# Altium PCB PCB_EasyEDA_2024-05-02.pcbdoc
Units mm, origin at the board's own origin, x right, y up, seen from the top; angles counter-clockwise.
Board outline 101.65 x 114.65 mm, 2 copper layers (Top Layer, Bottom Layer); 29 components, 51 nets, 135 pads, 0 vias.
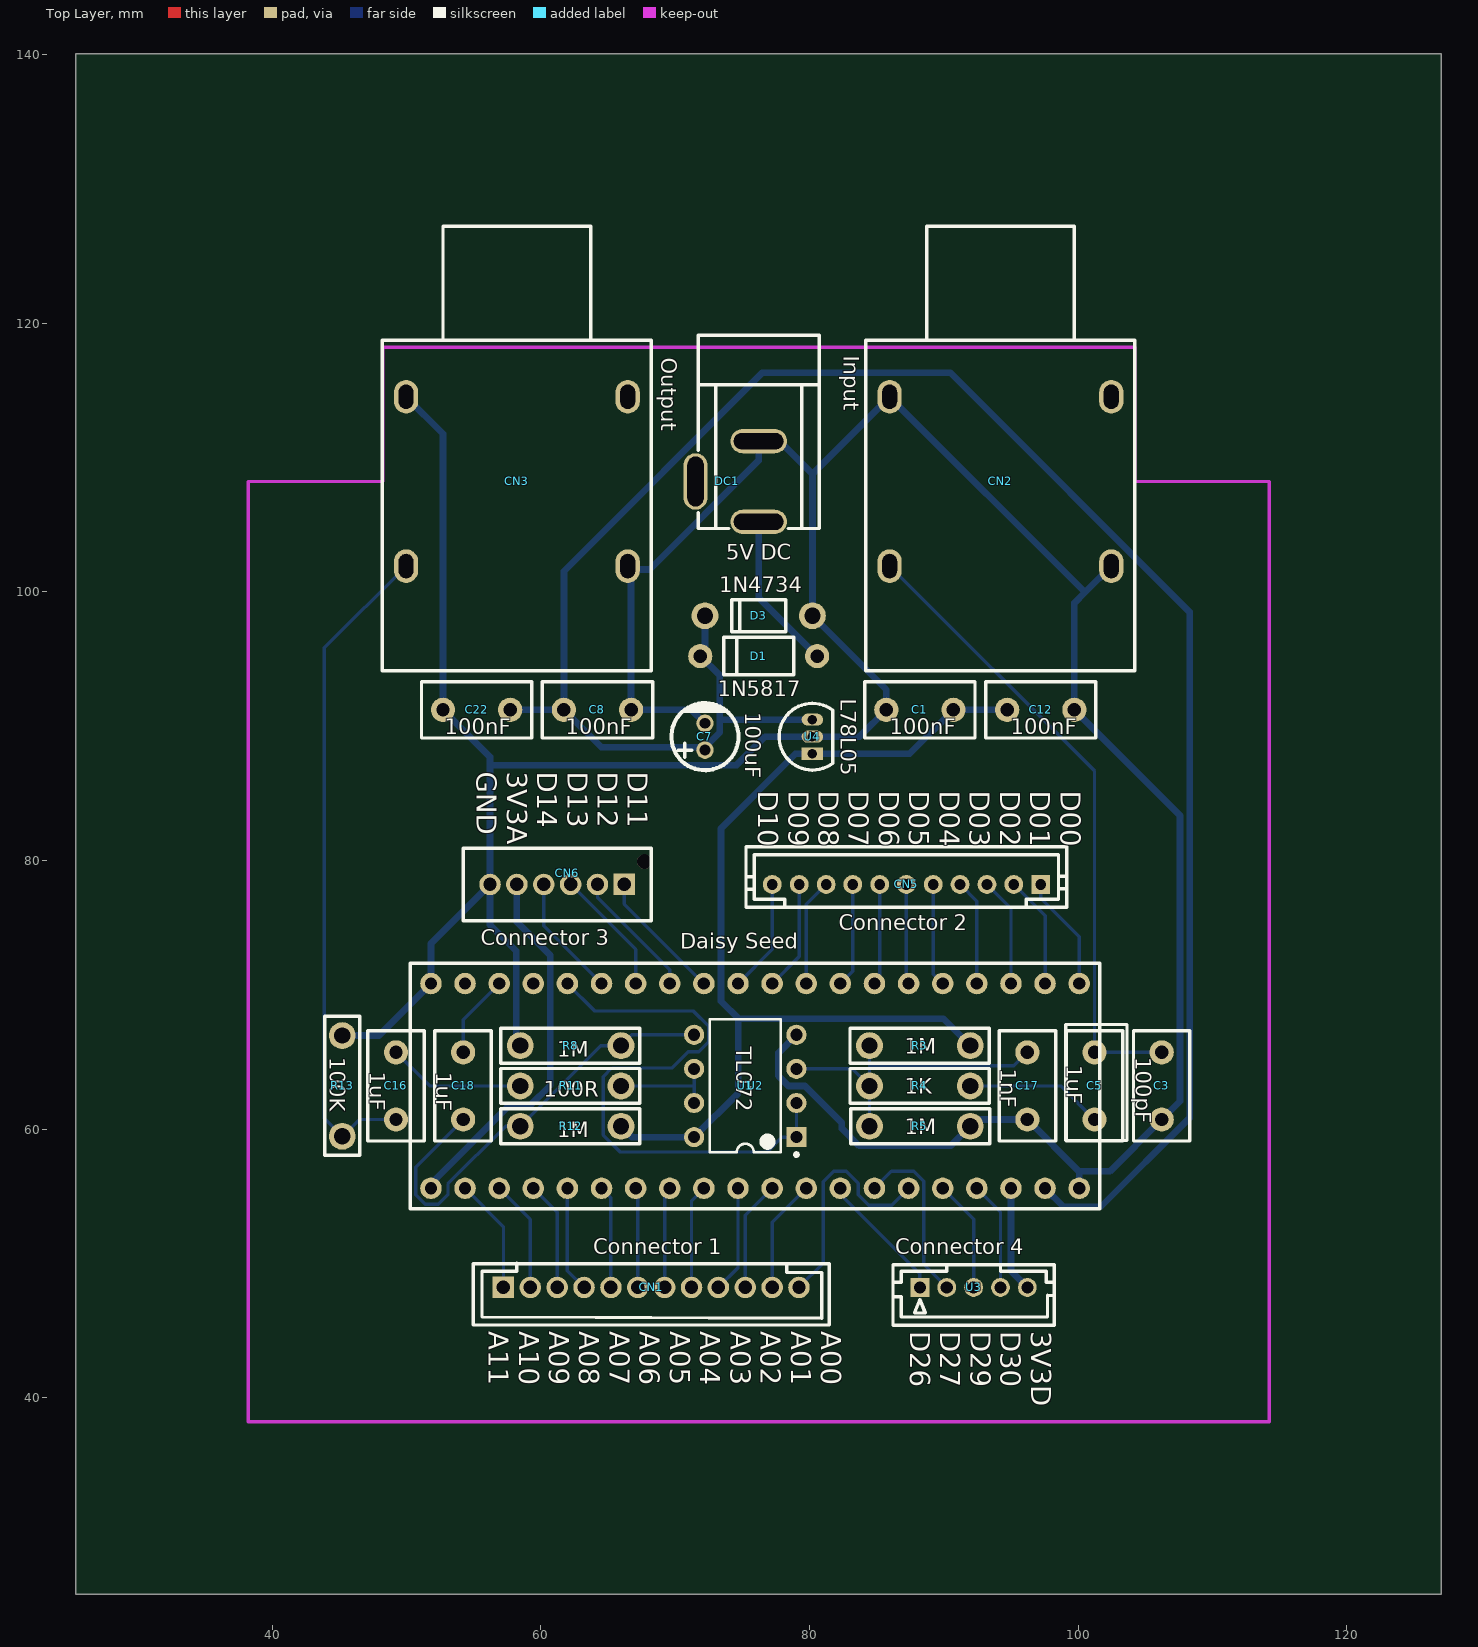
[diagram p0: Top Layer view]
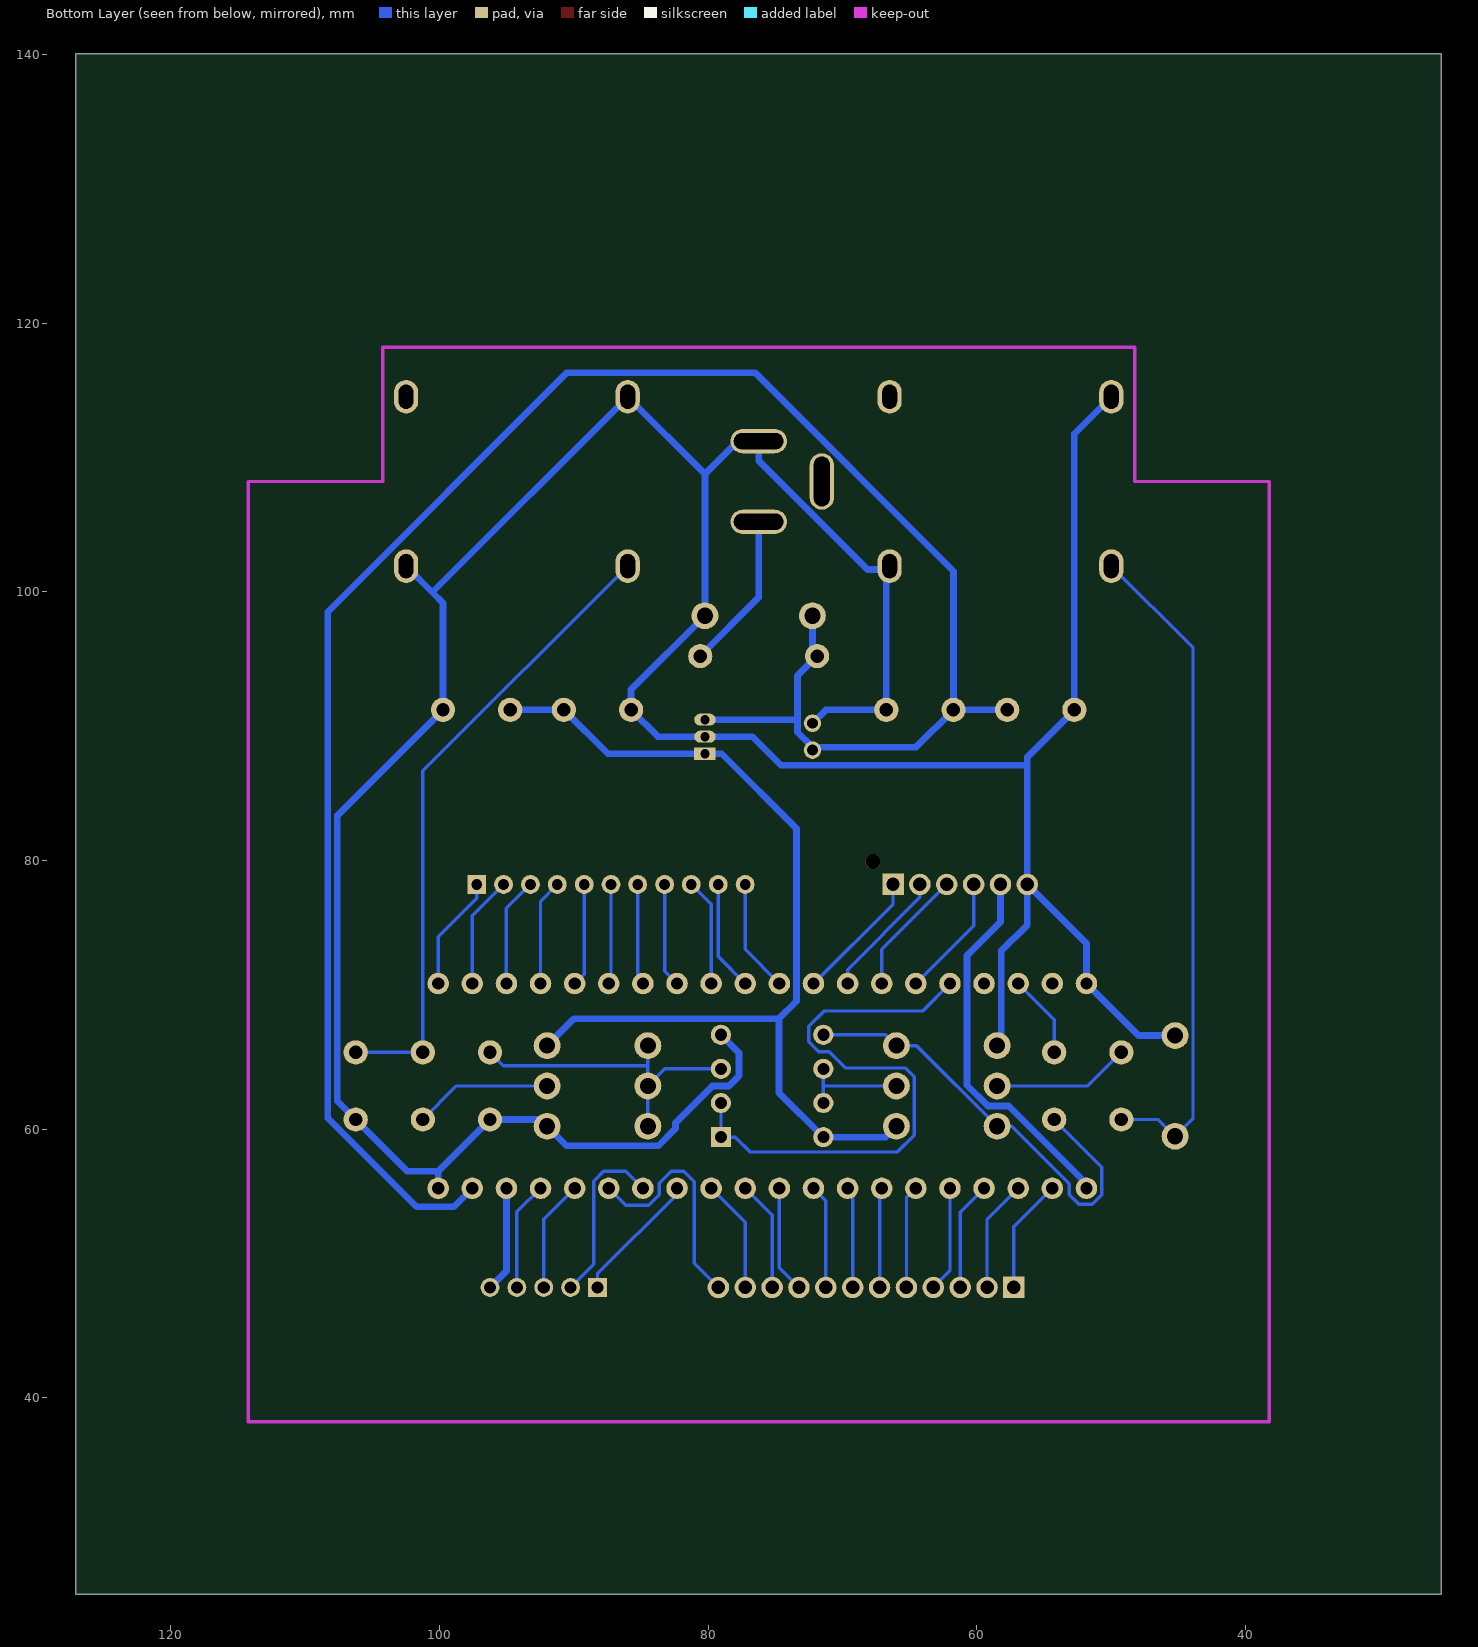
[diagram p1: Bottom Layer view, seen from below]

## Layer stack, top to bottom
Top Solder: solder mask 0.0102, Solder Resist, Dk 3.5
Top Layer: signal copper 0.0356
Dielectric1: dielectric 0.32, FR-4, Dk 4.8
Bottom Layer: signal copper 0.0356
Bottom Solder: solder mask 0.0102, Solder Resist, Dk 3.5

## Board outline
127.054,25.4 25.4,25.4 25.4,140.054 127.054,140.054

## Design rules (kind name [scope] priority, off if disabled: settings)
Clearance [All] p1: gap=0.254 ignorepadtopadclearanceinfootprint=FALSE except(0: Arc-Hole Track-Hole SMDPad-Hole THPad-Hole Via-Hole Fill-Hole Poly-Hole Region-Hole Text-Hole)
PolygonConnect [All] p1: connectstyle=Relief reliefconductorwidth=0.254 reliefentries=4 polygonreliefangle="90 Angle" airgapwidth=0.254
RoutingVias [All] p1: holewidth=0.711 width=1.27 viastyle="Through Hole" minholewidth=0.711 minwidth=1.27 maxholewidth=0.711 maxwidth=1.27
SolderMaskExpansion [All] p1: expansion=0.102 istentingtop=FALSE
Width [All] p1: maxlimit=0.254 minlimit=0.254 preferedwidth=0.254
30 further rules are at their usual default settings.

## Components (designator, comment, footprint, x,y, rotation, side; value= is the part's Value field where it differs from the comment)
C1 "100nF" CAP-TH_L8.0-W4.0-P5.00-D0.7 88.227,91.227 r0 top
C3 "100pF" CAP-TH_L8.0-W4.0-P5.00-D0.7 106.227,63.227 r270 top
C5 "1uF" CAP-TH_L8.0-W4.0-P5.00-D0.7 101.227,63.227 r270 top
C7 "100uF" CAP-TH_BD5.0-P2.00-D0.8-FD 72.227,89.227 r90 top
C8 "100nF" CAP-TH_L8.0-W4.0-P5.00-D0.7 64.227,91.227 r180 top
C12 "100nF" CAP-TH_L8.0-W4.0-P5.00-D0.7 97.227,91.227 r180 top
C16 "1uF" CAP-TH_L8.0-W4.0-P5.00-D0.7 49.227,63.227 r270 top
C17 "1nF" CAP-TH_L8.0-W4.0-P5.00-D0.7 96.227,63.227 r270 top
C18 "1uF" CAP-TH_L8.0-W4.0-P5.00-D0.7 54.227,63.227 r270 top
C22 "100nF" CAP-TH_L8.0-W4.0-P5.00-D0.7 55.227,91.227 r0 top
CN1 "Connector 1" CONN-TH_12P-P2.00_A2001WV-12P 68.227,48.227 r0 top
CN2 "Input" AUDIO-TH_CK6.35-3-15-6 94.227,108.227 r270 top
CN3 "Output" AUDIO-TH_CK6.35-3-15-6 58.227,108.227 r270 top
CN5 "Connector 2" CONN-TH_11P-P2.00_PH11A 87.227,78.226 r180 top
CN6 "Connector 3" CONN-TH_B06B-PASK-1-LF-SN 61.227,78.227 r0 top
D1 "1N5817" DO-41_BD2.4-L4.7-P8.70-D0.9-RD 76.227,95.227 r0 top
D3 "1N4734" DO-41G_BD2.4-L4.0-P8.00-D0.7-RD 76.227,98.227 r0 top
DC1 "5V DC" CONN-TH_DC-005-2.5A-2.0 73.876,108.226 r270 top
R3 "1M" PS-RES-16.5*6.42 88.227,66.227 r0 top
R4 "1K" PS-RES-16.5*6.42 88.227,63.227 r0 top
R5 "1M" PS-RES-16.5*6.42 88.227,60.227 r180 top
R8 "1M" PS-RES-16.5*6.42 62.227,66.227 r0 top
R11 "100R" PS-RES-16.5*6.42 62.227,63.227 r0 top
R12 "1M" PS-RES-16.5*6.42 62.227,60.227 r0 top
R13 "100K" PS-RES-16.5*6.42 45.227,63.227 r270 top
U1 "TL072" DIP-8_L9.7-W6.6-P2.54-LS7.6-BL 75.227,63.227 r90 top
U2 "Daisy Seed" DAISY_SEED 77.227,63.227 r90 top
U3 "Connector 4" CONN-TH_B5B-PH-K-S-LF-SN 92.227,48.227 r180 top
U4 "L78L05" TO-92-3_L4.9-W3.7-P1.27-L 80.226,89.227 r90 top

## Footprints (in the part's own frame and the unit in brackets; to place one, negate y for a bottom-side part, rotate by r counter-clockwise, add the part's x,y. Pads: shape width x height; smd on the part's side, far side on the other; paste and mask are expansions set on the pad)
AUDIO-TH_CK6.35-3-15-6 [mm]
  oval 2.5x1.8 hole 1.1 slot 1.8 at 0 deg paste+0 mask+0.051: 1(-6.3,-8.25) 2(-6.3,8.25) 3(6.3,-8.25) 4(6.3,8.25)
  silkscreen extent -19,-10.03 14.1,10
CAP-TH_BD5.0-P2.00-D0.8-FD [mm]
  round 1.3 hole 0.8 paste+0 mask+0.051: 1(-1,0) 2(1,0)
  silkscreen extent -2.5,-2.5 2.5,2.5
CAP-TH_L8.0-W4.0-P5.00-D0.7 [mm]
  round 1.8 hole 1 paste+0 mask+0.051: 1(-2.5,0) 2(2.5,0)
  silkscreen extent -4.1,-2.1 4.1,2.1
CONN-TH_11P-P2.00_PH11A [mm]
  rect 1.4x1.4 hole 0.8 paste+0 mask+0.051: 1(-9.991,0)
  round 1.4 hole 0.8 paste+0 mask+0.051: 2(-7.991,0) 3(-5.991,0) 4(-3.991,0) 5(-1.991,0) 6(0.009,0) 7(1.99,0) 8(3.997,0) 9(5.978,0) 10(7.984,0) 11(9.991,0)
  silkscreen extent -11.93,-2.79 11.95,1.7
CONN-TH_12P-P2.00_A2001WV-12P [mm]
  rect 1.6x1.6 hole 1 paste+0 mask+0.051: 1(-11,0)
  round 1.6 hole 1 paste+0 mask+0.051: 2(-9,0) 3(-7,0) 4(-5,0) 5(-3,0) 6(-1,0) 7(1,0) 8(3,0) 9(5,0) 10(7,0) 11(9,0) 12(11,0)
  silkscreen extent -13.26,-2.79 13.26,1.8
CONN-TH_B5B-PH-K-S-LF-SN [mm]
  rect 1.4x1.4 hole 0.9 paste+0 mask+0.051: 1(4,0)
  round 1.4 hole 0.9 paste+0 mask+0.051: 2(2,0) 3(0,0) 4(-2,0) 5(-4,0)
  silkscreen extent -6,-1.7 6,2.8
CONN-TH_B06B-PASK-1-LF-SN [mm]
  rect 1.6x1.6 hole 1 paste+0 mask+0.051: 1(5,0)
  round 1.6 hole 1 paste+0 mask+0.051: 2(3,0) 3(1,0) 4(-1,0) 5(-3,0) 6(-5,0)
  round 1.1 hole 1.1 unplated paste+0: ""(6.5,1.7)
  silkscreen extent -7,-2.7 7,2.7
CONN-TH_DC-005-2.5A-2.0 [mm]
  oval 1.8x4.2 hole 1.2 slot 3.7 at 90 deg paste+0 mask+0.051: 1(3,2.35) 2(-3,2.35)
  oval 4.2x1.8 hole 1.2 slot 3.7 at 0 deg paste+0 mask+0.051: 3(0,-2.35)
  silkscreen extent -10.9,-2.15 3.5,6.85
DAISY_SEED [mm]
  round 1.6 hole 0.914 paste+0 mask+0.102: 1(7.62,-22.86) 2(7.62,-20.32) 3(7.62,-17.78) 4(7.62,-15.24) 5(7.62,-12.7) 6(7.62,-10.16) 7(7.62,-7.62) 8(7.62,-5.08) 9(7.62,-2.54) 10(7.62,0) 11(7.62,2.54) 12(7.62,5.08) 13(7.62,7.62) 14(7.62,10.16) 15(7.62,12.7) 16(7.62,15.24) 17(7.62,17.78) 18(7.62,20.32) 19(7.62,22.86) 20(7.62,25.4) 21(-7.62,25.4) 22(-7.62,22.86) 23(-7.62,20.32) 24(-7.62,17.78) 25(-7.62,15.24) 26(-7.62,12.7) 27(-7.62,10.16) 28(-7.62,7.62) 29(-7.62,5.08) 30(-7.62,2.54) 31(-7.62,0) 32(-7.62,-2.54) 33(-7.62,-5.08) 34(-7.62,-7.62) 35(-7.62,-10.16) 36(-7.62,-12.7) 37(-7.62,-15.24) 38(-7.62,-17.78) 39(-7.62,-20.32) 40(-7.62,-22.86)
  silkscreen extent -9.14,-26.42 9.14,26.92
DIP-8_L9.7-W6.6-P2.54-LS7.6-BL [mm]
  rect 1.5x1.5 hole 0.9 paste+0 mask+0.051: 1(-3.81,-3.81)
  round 1.5 hole 0.9 paste+0 mask+0.051: 2(-1.27,-3.81) 3(1.27,-3.81) 4(3.81,-3.81) 5(3.81,3.81) 6(1.27,3.81) 7(-1.27,3.81) 8(-3.81,3.81)
  silkscreen extent -5.23,-3.93 4.96,2.65
DO-41_BD2.4-L4.7-P8.70-D0.9-RD [mm]
  round 1.8 hole 1 paste+0 mask+0.051: 1(-4.35,0) 2(4.35,0)
  silkscreen extent -2.6,-1.4 2.6,1.4
DO-41G_BD2.4-L4.0-P8.00-D0.7-RD [mm]
  round 2 hole 1.2 paste+0 mask+0.051: 1(-4,0) 2(4,0)
  silkscreen extent -2,-1.2 2,1.2
PS-RES-16.5*6.42 [mm]
  round 2 hole 1.2 paste+0 mask+0.051: 1(-3.749,0) 2(3.749,0)
  silkscreen extent -5.2,-1.3 5.15,1.3
TO-92-3_L4.9-W3.7-P1.27-L [mm]
  rect 0.9x1.6 hole 0.7 paste+0 mask+0.051: 1(-1.27,0)
  oval 0.9x1.6 hole 0.7 paste+0 mask+0.051: 2(0,0) 3(1.27,0)
  silkscreen extent -2.48,-1.5 2.48,2.48

## Nets (pads, with @x,y where several pads share a name; then routed paths per layer and width w, separated by ;. In a path a pad name is that pad's centre, name@x,y a point inside that pad or via, vN(x,y) a via of type N, cw(c..) or ccw(c..) an arc to the next point about the centre after c; other vN are vias at no path point)
3V3A: CN6.5 U2.21 | length 28.2
  Bottom Layer w0.5: U2.21 51.827,55.945 57.609,61.727 59.162,61.727 60.717,63.282 60.717,72.945 58.227,75.435 CN6.5
3V3D: U2.38 U3.5 | length 7.9
  Bottom Layer w0.5: U2.38 95.007,49.447 U3.5
5V: C1.2 C12.2 R3.2 R12.2 U1.8 U4.1 | length 73.7
  Bottom Layer w0.5: R12.2 66.786,59.417 U1.8 74.711,62.711 74.711,68.239 ; R3.2 89.964,68.239 74.711,68.239 ; C12.2 C1.2 87.457,87.957 U4.1 80.156,87.957 78.975,87.957 73.417,82.398 73.417,69.533 74.711,68.239
5VDCIN: D1.2 DC1.1 | length 11.8
  Bottom Layer w0.5: DC1.1 76.226,99.578 D1.2
A00/D15: CN1.1 U2.22 | length 8.6
  Bottom Layer w0.25: U2.22 57.227,52.747 CN1.1
A01/D16: CN1.2 U2.23 | length 8.3
  Bottom Layer w0.25: U2.23 59.227,53.287 CN1.2
A02/D17: CN1.3 U2.24 | length 8.1
  Bottom Layer w0.25: U2.24 61.227,53.827 CN1.3
A03/D18: CN1.4 U2.25 | length 7.9
  Bottom Layer w0.25: U2.25 61.987,49.467 CN1.4
A04/D19: CN1.5 U2.26 | length 7.7
  Bottom Layer w0.25: U2.26 65.227,54.907 CN1.5
A05/D20: CN1.6 U2.27 | length 7.4
  Bottom Layer w0.25: U2.27 67.227,55.447 CN1.6
A06/D21: CN1.7 U2.28 | length 7.5
  Bottom Layer w0.25: CN1.7 69.227,55.227 U2.28
A07/D22: CN1.8 U2.29 | length 7.8
  Bottom Layer w0.25: CN1.8 71.227,54.687 U2.29
A08/D23: CN1.9 U2.30 | length 8
  Bottom Layer w0.25: CN1.9 74.687,49.687 U2.30
A09/D24: CN1.10 U2.31 | length 8.2
  Bottom Layer w0.25: CN1.10 75.227,53.607 U2.31
A10/D25: CN1.11 U2.32 | length 8.4
  Bottom Layer w0.25: CN1.11 77.227,53.067 U2.32
A11/D28: CN1.12 U2.35 | length 17.4
  Bottom Layer w0.25: CN1.12 81.037,50.037 81.037,56.093 81.814,56.87 82.733,56.87 83.638,55.965 83.638,55.116 84.405,54.349 86.129,54.349 U2.35
C5_1: C3.1 C5.1 CN2.3 | length 47.5
  Bottom Layer w0.25: CN2.3 101.227,86.677 C5.1 C3.1
C16_1: C16.1 R11.1 | length 10.3
  Bottom Layer w0.25: C16.1 51.727,63.227 R11.1
C17_1: C17.1 R3.1 R4.1 R5.2 U1.3 | length 24.1
  Bottom Layer w0.25: U1.3 83.208,64.497 R4.1 ; R5.2 R4.1 ; R3.1 84.478,64.727 ; C17.1 95.227,64.727 84.478,64.727 ; R4.1 84.478,64.727
CN2_2: CN2.2
CN3_2: CN3.2
D00: CN5.1 U2.1 | length 8.6
  Bottom Layer w0.25: CN5.1 97.219,77.201 100.087,74.333 U2.1
D01: CN5.2 U2.2 | length 8.3
  Bottom Layer w0.25: CN5.2 97.547,75.898 U2.2
D02: CN5.3 U2.3 | length 8.1
  Bottom Layer w0.25: CN5.3 95.007,76.438 U2.3
D03: CN5.4 U2.4 | length 7.9
  Bottom Layer w0.25: CN5.4 92.467,76.978 U2.4
D04: CN5.5 U2.5 | length 7.7
  Bottom Layer w0.25: CN5.5@89.219,78.226 89.219,71.555 U2.5
D05: CN5.6 U2.6 | length 7.4
  Bottom Layer w0.25: CN5.6 87.219,71.015 U2.6
D06: CN5.7 U2.7 | length 7.5
  Bottom Layer w0.25: U2.7 85.238,71.238 CN5.7
D07: CN5.8 U2.8 | length 7.8
  Bottom Layer w0.25: U2.8 83.231,71.771 CN5.8
D08: CN5.9 U2.9 | length 8
  Bottom Layer w0.25: U2.9 79.767,76.744 CN5.9
D09: CN5.10 U2.10 | length 8.2
  Bottom Layer w0.25: U2.10 79.243,72.863 CN5.10
D10: CN5.11 U2.11 | length 8.4
  Bottom Layer w0.25: U2.11 77.237,73.397 CN5.11
D11: CN6.1 U2.12 | length 9.8
  Bottom Layer w0.25: CN6.1 66.227,76.767 U2.12
D12: CN6.2 U2.13 | length 9.6
  Bottom Layer w0.25: CN6.2 64.227,77.26 69.607,71.88 U2.13
D13: CN6.3 U2.14 | length 9.4
  Bottom Layer w0.25: CN6.3 67.067,73.387 U2.14
D14: CN6.4 U2.15 | length 9.2
  Bottom Layer w0.25: CN6.4 60.227,75.147 U2.15
D26: U2.33 U3.1 | length 9.8
  Bottom Layer w0.25: U2.33 82.307,55.172 88.227,49.252 U3.1
D27: U2.34 U3.2 | length 13.1
  Bottom Layer w0.25: U2.34 86.11,56.87 87.78,56.87 88.514,56.136 88.514,49.94 U3.2
D29: U2.36 U3.3 | length 8.3
  Bottom Layer w0.25: U2.36 92.227,53.307 U3.3
D30: U2.37 U3.4 | length 8.1
  Bottom Layer w0.25: U2.37 94.227,53.847 U3.4
DC1_3: DC1.3
GND: C1.1 C3.2 C7.2 C8.1 C12.1 C17.2 C22.1 CN2.1 CN2.4 CN3.1 CN3.4 CN6.6 D3.2 DC1.2 R5.1 R8.1 R13.1 U1.4 U2.20 U2.40 U4.2 | length 271
  Bottom Layer w0.5: R13.1 47.956,66.976 U2.20 51.827,73.827 CN6.6 ; CN3.1 52.727,111.777 C22.1 56.227,87.727 56.227,87.106 ; R8.1 58.177,66.528 58.177,73.271 56.227,75.221 CN6.6 ; CN3.4 CN3.4@66.727,101.677 ; C7.2 71.227,91.227 C8.1 CN3.4@66.727,101.677 ; U1.4 77.691,65.691 77.691,63.977 78.441,63.227 79.673,63.227 82.421,60.479 82.421,60.053 83.705,58.77 90.518,58.77 R5.1 92.476,60.727 C17.2 100.087,56.867 ; U2.40 100.087,56.867 ; CN2.4 100.527,99.977 ; CN6.6 56.227,87.106 ; 56.227,87.106 74.587,87.106 76.708,89.227 U4.2 83.727,89.227 C1.1 85.727,92.727 D3.2 80.227,108.777 ; CN3.4@66.727,101.677 68.115,101.677 76.226,109.789 DC1.2 77.778,111.226 80.227,108.777 ; 80.227,108.777 CN2.1 100.527,99.977 ; 100.087,56.867 102.367,56.867 C3.2 107.59,62.09 107.59,83.364 C12.1 99.727,99.177 100.527,99.977
LINEINL: U1.1 U1.2 U2.16 | length 44.2
  Bottom Layer w0.25: U2.16 64.028,68.806 71.357,68.806 72.501,67.661 72.501,66.507 71.761,65.767 70.985,65.767 69.785,64.568 65.304,64.568 64.649,63.912 64.649,59.572 65.911,58.31 76.854,58.31 77.961,59.417 U1.1 U1.2
LINEINR: U2.17
LINEOUTL: C18.1 U2.18 | length 6.2
  Bottom Layer w0.25: C18.1 54.227,68.167 U2.18
LINEOUTR: U2.19
R4_2: C5.2 R4.2 | length 10.3
  Bottom Layer w0.25: R4.2 98.727,63.227 C5.2
R11_2: R11.2 U1.6 U1.7 | length 8
  Bottom Layer w0.25: R11.2 71.417,63.227 ; U1.7 71.417,63.227 ; U1.6 71.417,63.227
R12_1: C18.2 R8.2 R12.1 U1.5 | length 33.8
  Bottom Layer w0.25: C18.2 50.69,57.19 50.69,55.121 51.395,54.416 52.381,54.416 53.097,55.133 53.097,55.93 57.394,60.227 R12.1 64.478,66.227 R8.2 66.786,67.037 U1.5
R13_2: C16.2 CN3.3 R13.2 | length 50
  Bottom Layer w0.25: C16.2 46.476,60.727 R13.2 43.892,60.813 43.892,95.842 CN3.3
VCC: C7.1 C8.2 C22.2 D1.1 D3.1 U2.39 U4.3 | length 155.9
  Bottom Layer w0.5: C22.2 C8.2 ; C7.1 C7.1@72.227,88.448 ; D3.1 72.227,95.577 D1.1 73.333,93.771 73.333,90.497 ; U4.3 73.333,90.497 ; U2.39 98.923,54.231 101.692,54.231 108.306,60.845 108.306,98.509 90.491,116.325 76.513,116.325 61.727,101.539 C8.2 ; C8.2 64.506,88.448 C7.1@72.227,88.448 ; C7.1@72.227,88.448 73.333,89.554 73.333,90.497
pads on no net: CN6.

## Silkscreen, mask and mechanical layers (free items; w line width, h text height)
Top Overlay:
  text "D11 / D12 / D13 / D14 / 3V3A / GND" at 55.245,86.614 h1.5 r270
  text "D00 / D01 / D02 / D03 / D04 / D05 / D06 / D07 / D08 / D09 / D10" at 76.2,85.217 h1.5 r270
  text "A00 / A01 / A02 / A03 / A04 / A05 / A06 / A07 / A08 / A09 / A10 / A11" at 56.134,44.958 h1.5 r270
  text "3V3D / D30 / D29 / D27 / D26" at 87.503,44.958 h1.5 r270